# Altium PCB PCB1.PcbDoc
Units mm, origin at the board's own origin, x right, y up, seen from the top; angles counter-clockwise.
Board outline 32.5 x 30.25 mm, 2 copper layers (L1, L2), stack 1.594 mm thick; 36 components, 64 nets, 173 pads, 102 vias.
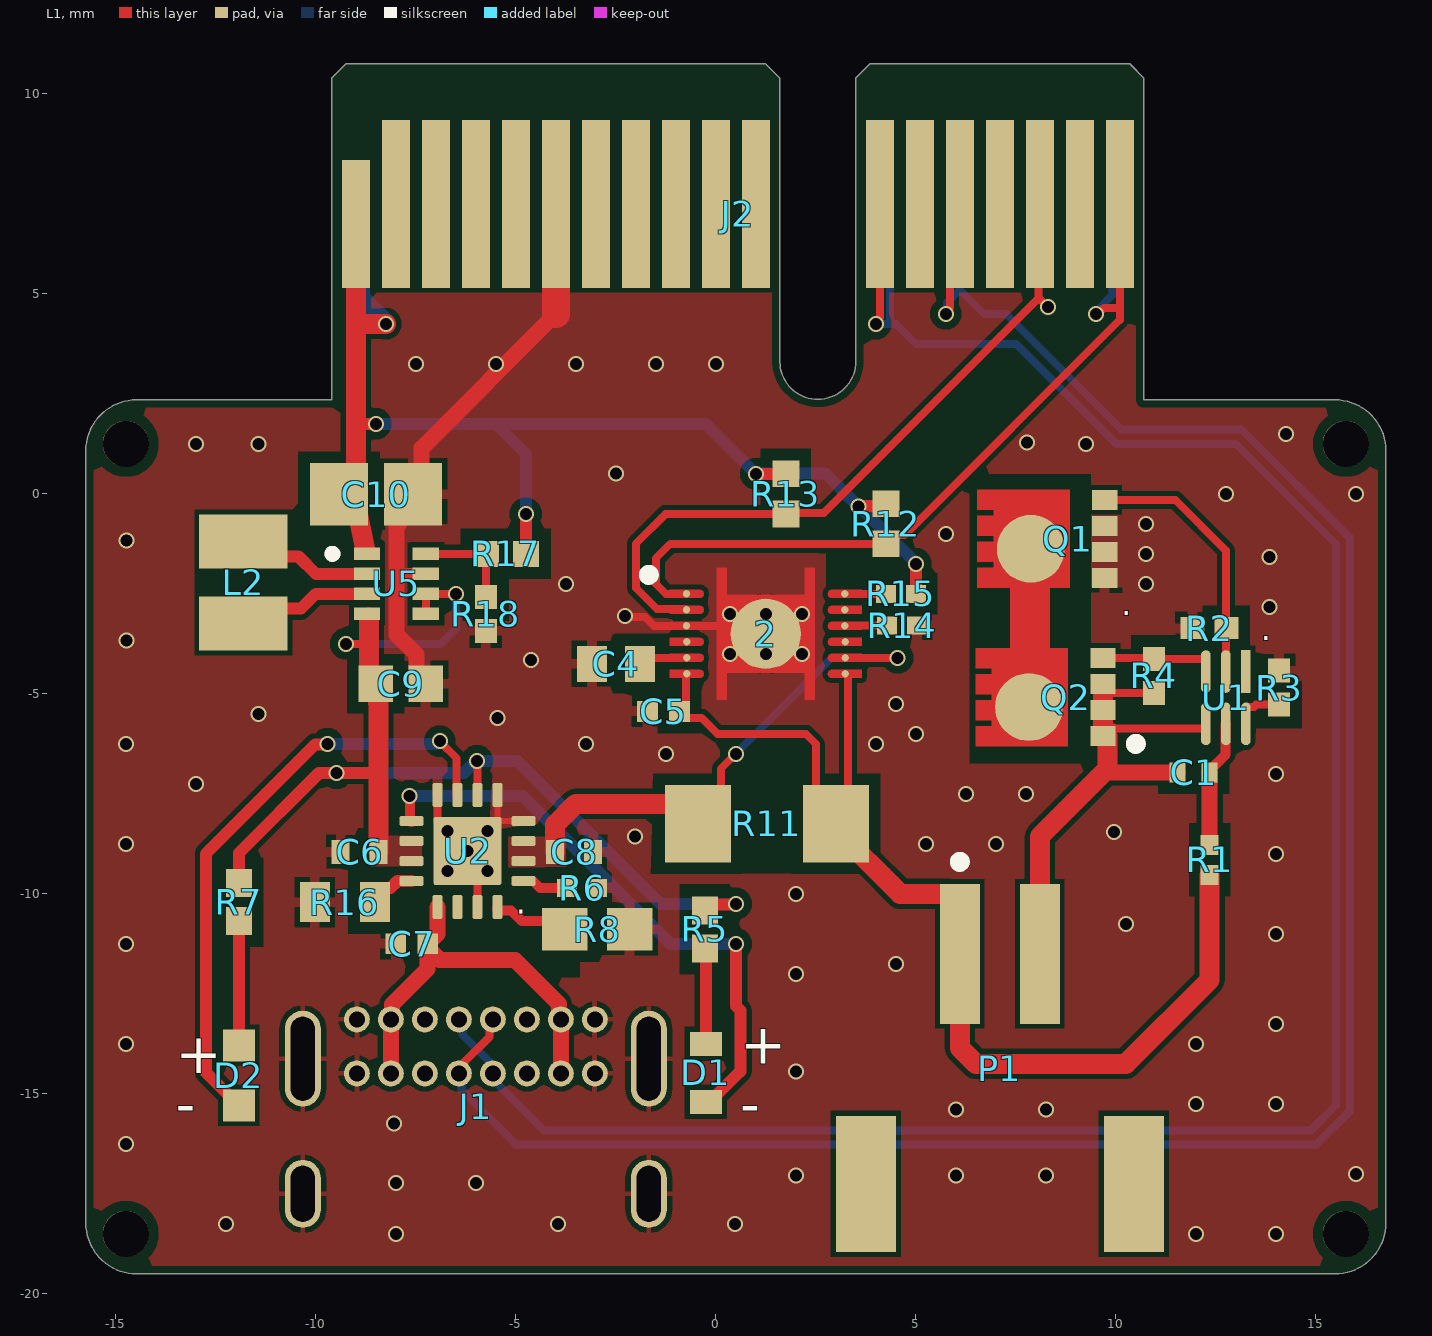
[diagram p0: L1 view]
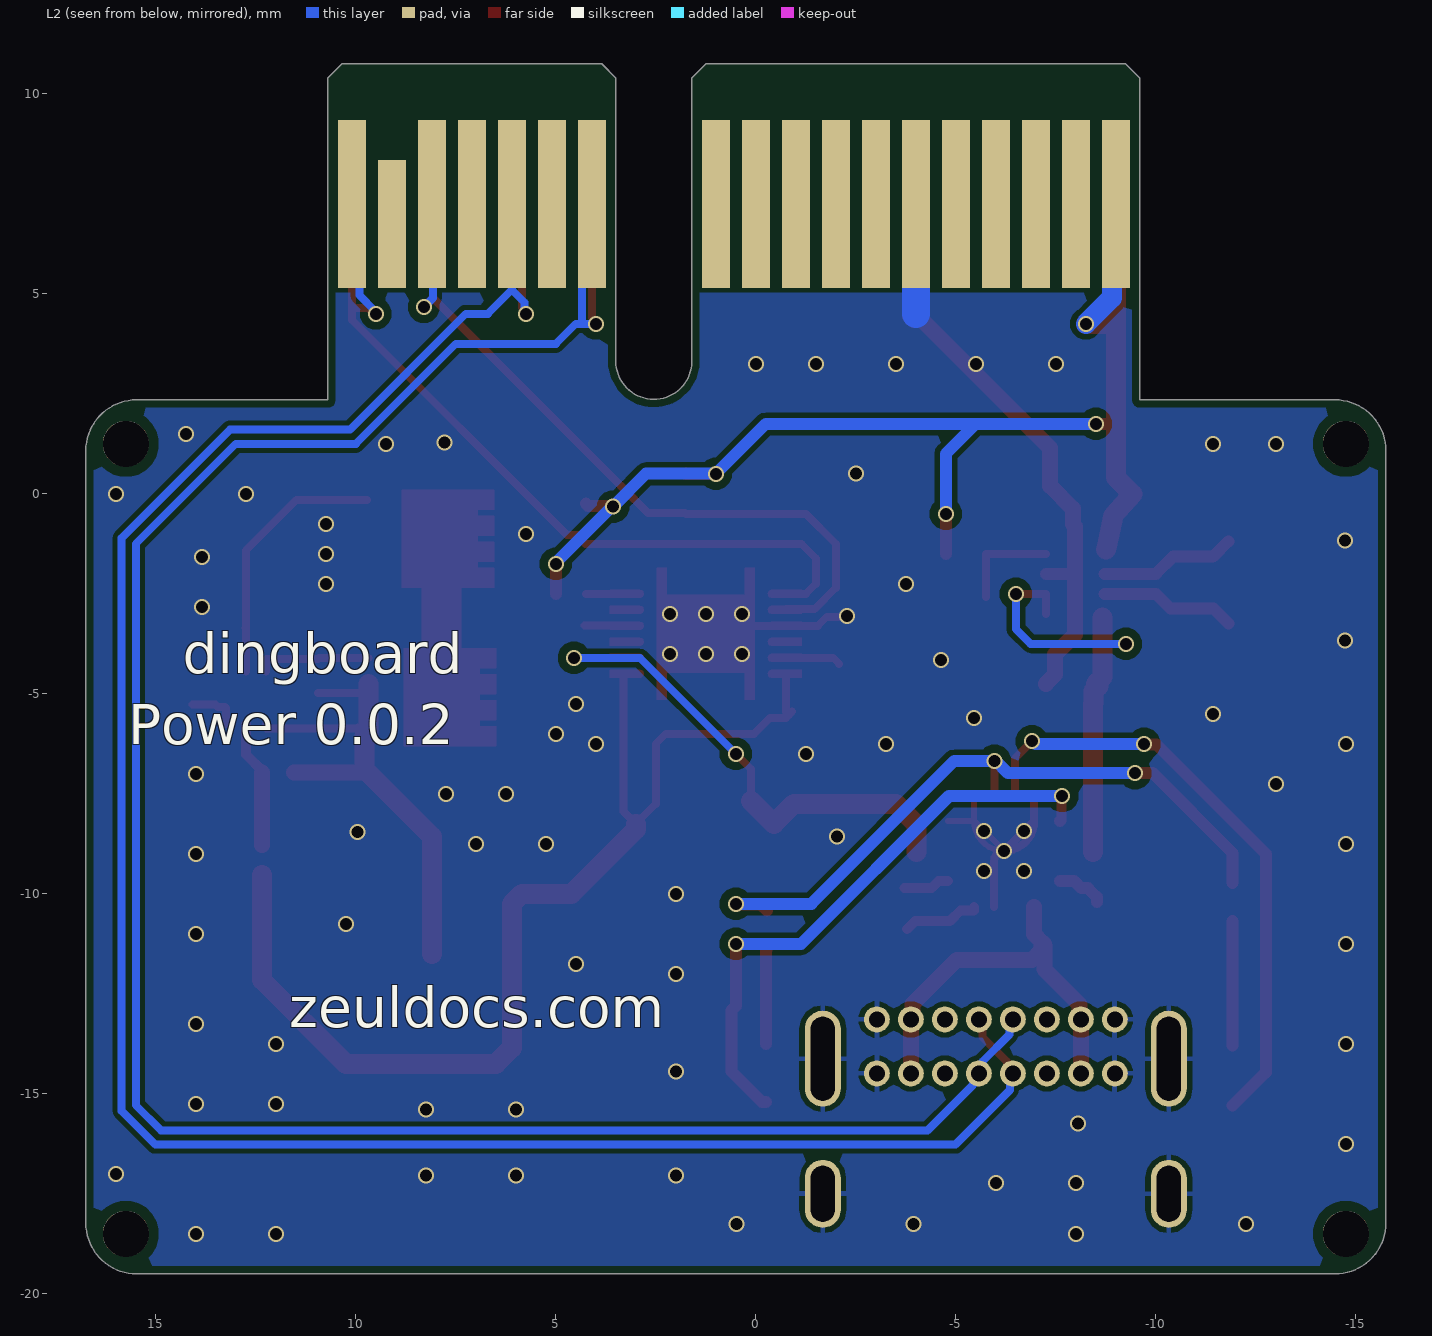
[diagram p1: L2 view, seen from below]
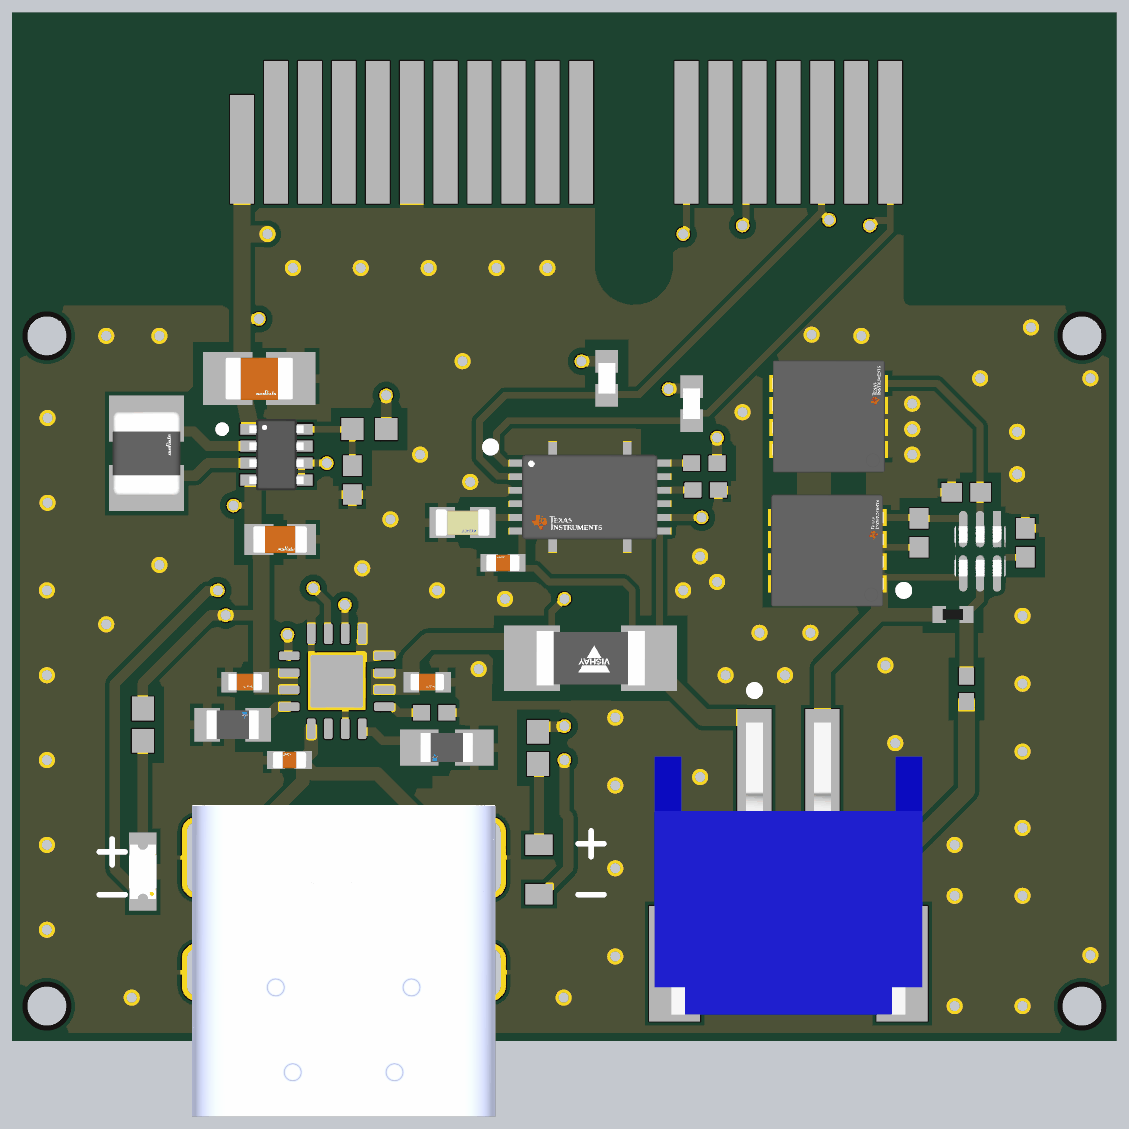
[diagram p2: 3D render of the assembled board from above, using the file's embedded part models]

## Layer stack, top to bottom
Top Solder: solder mask 0.0025, Solder Resist, Dk 1
L1: signal copper 0.035
Core: dielectric 1.524, FR-4, Dk 4.6
L2: signal copper 0.035
Bottom Solder: solder mask 0.0025, Solder Resist, Dk 1

## Board outline
-15.75,-18.23 ccw(c-14.48,-18.23) -14.48,-19.5 15.48,-19.5 ccw(c15.48,-18.23) 16.75,-18.23 16.75,1.08 ccw(c15.48,1.08) 15.48,2.35 10.7,2.35 10.7,10.396 10.346,10.75 3.854,10.75 3.5,10.396 3.5,3.3 3.5,3.313 cw(c2.55,3.313) 1.6,3.3 1.6,10.396 1.245,10.75 -9.245,10.75 -9.6,10.396 -9.6,2.35 -14.48,2.35 ccw(c-14.48,1.08) -15.75,1.08

## Design rules (kind name [scope] priority, off if disabled: settings)
BoardOutlineClearance [All] p1: gap=0.2 ignorepadtopadclearanceinfootprint=FALSE
Clearance Clearance_CAP [InComponentClass('1power')] p1: gap=0.127 ignorepadtopadclearanceinfootprint=FALSE except(0.15: Arc-SMDPad Track-SMDPad SMDPad-SMDPad SMDPad-Text THPad-Text; 0.152: Arc-Arc Arc-Track Track-Track; 0.2: Arc-Via Track-Via Via-Via Via-Hole; 0.25: Arc-Hole Track-Hole SMDPad-Hole THPad-Hole Fill-Hole Poly-Hole Region-Hole Text-Hole; 0.28: Arc-THPad Track-THPad; 0.3: SMDPad-Fill SMDPad-Poly SMDPad-Region)
Clearance [All] p2: gap=0.127 ignorepadtopadclearanceinfootprint=FALSE except(0.15: Arc-SMDPad Track-SMDPad SMDPad-SMDPad SMDPad-Text THPad-Text; 0.152: Arc-Arc Arc-Track Track-Track; 0.2: Arc-Via Track-Via Via-Via Via-Hole; 0.25: Arc-Hole Track-Hole SMDPad-Hole THPad-Hole Fill-Hole Poly-Hole Region-Hole Text-Hole; 0.28: Arc-THPad Track-THPad)
ComponentClearance [All] p1: gap=0.127 collisioncheckmode=3 verticalgap=0.127 showdistances=TRUE
DiffPairsRouting [All] p1: maxlimit=0.254 minlimit=0.1 mostfreqgap=0.127 substack1={52762232-6F04-41D9-A687-E8FF21229EE0} toplayer_{52762232-6f04-41d9-a687-e8ff21229ee0}_minwidth=0.381 toplayer_{52762232-6f04-41d9-a687-e8ff21229ee0}_maxwidth=0.381 toplayer_{52762232-6f04-41d9-a687-e8ff21229ee0}_prefwidth=0.381 bottomlayer_{52762232-6f04-41d9-a687-e8ff21229ee0}_minwidth=0.381 bottomlayer_{52762232-6f04-41d9-a687-e8ff21229ee0}_maxwidth=0.381 bottomlayer_{52762232-6f04-41d9-a687-e8ff21229ee0}_prefwidth=0.381 toplayer_minwidth=0.1 toplayer_maxwidth=25.4 toplayer_prefwidth=0.127 bottomlayer_minwidth=0.1 bottomlayer_maxwidth=25.4 bottomlayer_prefwidth=0.127 substack2={80DEA706-9527-40CE-9459-B2B8583E4FA4} toplayer_{80dea706-9527-40ce-9459-b2b8583e4fa4}_minwidth=0.381 toplayer_{80dea706-9527-40ce-9459-b2b8583e4fa4}_maxwidth=0.381 toplayer_{80dea706-9527-40ce-9459-b2b8583e4fa4}_prefwidth=0.381 bottomlayer_{80dea706-9527-40ce-9459-b2b8583e4fa4}_minwidth=0.381 bottomlayer_{80dea706-9527-40ce-9459-b2b8583e4fa4}_maxwidth=0.381 bottomlayer_{80dea706-9527-40ce-9459-b2b8583e4fa4}_prefwidth=0.381 maxuncoupledlength=12.7
Height [All] p1: minheight=0 maxheight=1816.048 prefheight=12.7
HoleSize [All] p1: absolutevalues=TRUE maxlimit=6.3 minlimit=0.15 maxpercent=80.000 minpercent=20.000
HoleToHoleClearance [All] p1: gap=0.2 allowstackedmicrovias=FALSE
MinimumAnnularRing [All] p1: minimumring=0.05
MinimumSolderMaskSliver [All] p1: minsoldermaskwidth=0
PlaneClearance [All] p1: clearance=0.127
PlaneConnect PlaneConnectPowerPads [InPadClass('PowerPads')] p1: planeconnectstyle=Direct reliefexpansion=0.508 reliefentries=4 reliefconductorwidth=0.254 reliefairgap=0.254
PlaneConnect [All] p2: pad.planeconnectstyle=Relief pad.reliefexpansion=0.3 pad.reliefentries=4 pad.reliefconductorwidth=0.127 pad.reliefairgap=0.127 via.planeconnectstyle=Direct via.reliefexpansion=0.3 via.reliefentries=4 via.reliefconductorwidth=0.127 via.reliefairgap=0.127
PolygonConnect PolygonConnectPowerPins [InPolygonClass('PolygonClass_Power_Pins')] p1: connectstyle=Direct reliefconductorwidth=0.254 reliefentries=4 polygonreliefangle="90 Angle" airgapwidth=0.254
PolygonConnect PolygonConnectPowerPads [All vs (InPadClass('PowerPads'))] p2: connectstyle=Direct reliefconductorwidth=0.254 reliefentries=4 polygonreliefangle="90 Angle" airgapwidth=0.254
PolygonConnect [All] p3: thpad.connectstyle=Relief thpad.reliefconductorwidth=0.127 thpad.reliefentries=4 thpad.polygonreliefangle="90 Angle" thpad.airgapwidth=0.127 smdpad.connectstyle=Relief smdpad.reliefconductorwidth=0.25 smdpad.reliefentries=4 smdpad.polygonreliefangle="90 Angle" smdpad.airgapwidth=0.127 via.connectstyle=Direct via.reliefconductorwidth=0.127 via.reliefentries=4 via.polygonreliefangle="90 Angle" via.airgapwidth=0.127
RoutingVias [All] p1: holewidth=0.2 width=0.35 viastyle="Through Hole" minholewidth=0.15 minwidth=0.25 maxholewidth=0.3 maxwidth=0.7
SilkToSilkClearance [All] p1: silktosilkclearance=0.15
SilkToSolderMaskClearance [IsPad] p1: minsilkscreentomaskgap=0.127 clearancetoexposedcopper=TRUE
SolderMaskExpansion [All] p1: expansion=0.038 istentingtop=FALSE
SupplyNets "Schematic Supply Nets_7" [InNet('PGND')] p1: voltage=0.000
SupplyNets "Schematic Supply Nets_6" [InNet('VBAT')] p2: voltage=0.000
SupplyNets "Schematic Supply Nets_5" [InNet('3.3V')] p3: voltage=0.000
SupplyNets "Schematic Supply Nets_4" [InNet('PACKP')] p4: voltage=0.000
SupplyNets "Schematic Supply Nets_1" [InNet('VPRE')] p5: voltage=0.000
SupplyNets "Schematic Supply Nets" [InNet('VUSB')] p6: voltage=0.000
Width [All] p1: maxlimit=25.4 minlimit=0.1 preferedwidth=0.25 substack1={52762232-6F04-41D9-A687-E8FF21229EE0} substack2={80DEA706-9527-40CE-9459-B2B8583E4FA4} minimp=50.000000 maximp=50.000000 favimp=50.000000
20 further rules are at their usual default settings.

## Classes and differential pairs
polygon class PolygonClass_Power_Pins: PGND_L01_P045 PGND_L01_P046 PGND_L01_P049 VBAT_L01_P039 VPRE_L01_P041
component class 1power: C1 C4 C5 C6 C7 C8 C9 C10 R1 R2 R3 R4 R5 R6 R7 R8 R11 R12 R13 R14 R15 R16 R17 R18

## Components (designator, comment, footprint, x,y, rotation, side; value= is the part's Value field where it differs from the comment)
2 "Fuel Guage" FP-DRZ0012A-MFG 1.25,-3.5 r270 top (schematic designator U4)
C1 "0.1uF" FP-GRM15-MFG 11.948,-6.962 r0 top value=0.10μF
C4 "0.47uF" FP-C0603C-CF-MFG -2.5,-4.25 r180 top value="0.47 μF"
C5 "1uF" FP-C0402C105K8PACTU-MFG -1.31,-5.44 r180 top
C6 "4.7uF" FP-ZRB15X-0_15-MFG -8.908,-8.952 r0 top
C7 "1uF" FP-C0402C105K8PACTU-MFG -7.6,-11.25 r180 top
C8 "4.7uF" FP-ZRB15X-0_15-MFG -3.541,-8.952 r0 top
C9 "22uF" FP-GRM187-0_2-IPC_C -7.875,-4.75 r0 top
C10 "47uF" FP-GRM219-0_2-0_1-IPC_A -8.493,-0.01 r0 top
D1 "Red LED" VISH-TLMS1000_V -0.25,-14.475 r270 top
D2 "White LED" FP-6_541-5091_01-4-MFG -11.923,-14.54 r90 top
J1 "USB-C" GCT_USB4085-GF-A_REVB -6,-17.5 r0 top
J2 "PCIE" SAMTEC_PCIE-036-02-X-D-EMS3 0.55,7 r180 top
L2 "1uH" FP-DFE252012C-IPC_B -11.811,-2.214 r90 top
P1 "JST" "JST- S2B-PH-SM4-TB(LF)(SN)-2_V" 7.1,-14.95 r0 top
Q1 "Protection IC FET" FP-DQG0008A-MFG 8.29,-1.125 r90 top
Q2 "Protection IC FET" FP-DQG0008A-MFG 8.244,-5.081 r90 top
R1 "3.3K" RESC1005X40X25LL05T10 12.348,-9.152 r90 top
R2 "1M" RESC1005X40X25NL05T10 12.339,-3.356 r0 top
R3 "2.2K" RESC1005X40X25NL05T10 14.085,-4.847 r270 top
R4 "1M" RESC1005X40X25NL05T10 10.949,-4.554 r270 top
R5 "1.5K" RESC1005X40X25ML05T10 -0.275,-10.889 r90 top
R6 "10K" RESC1005X40X25LL05T10 -3.341,-9.852 r180 top
R7 "1.5K" RESC1005X40X25ML05T10 -11.923,-10.209 r90 top
R8 "1.8K" FP-CRCW0603-e3-IPC_A -2.966,-10.883 r180 top
R11 "0.01Ohm 1W 1206 1%" FP-WSLP1206-FP_1_65x1_93x-MFG 1.275,-8.25 r180 top
R12 "5.1K" FP-CRCW0402-e3-IPC_A 4.25,-0.748 r270 top
R13 "5.1K" FP-CRCW0402-e3-IPC_A 1.75,0 r270 top
R14 "10K" RESC1005X40X25LL05T10 4.659,-3.294 r0 top
R15 "10K" RESC1005X40X25LL05T10 4.625,-2.5 r0 top
R16 "3k" FP-CRCW0603-e3-MFG -9.276,-10.209 r0 top
R17 "511K" RESC1005X40X25ML05T05 -5.25,-1.5 r0 top
R18 "91k" RESC1005X40X25NL05T10 -5.75,-3 r90 top
U1 "Protection Ic" FP-DSE0006A-IPC_A 12.75,-5.096 r270 top
U2 "Charger/Switch" RGT0016C_V -6.208,-8.928 r180 top
U5 "Buck-Boost" SOT50P160X60-8N -7.985,-2.25 r0 top

## Footprints (in the part's own frame and the unit in brackets; to place one, negate y for a bottom-side part, rotate by r counter-clockwise, add the part's x,y. Pads: shape width x height; smd on the part's side, far side on the other; paste and mask are expansions set on the pad)
FP-6_541-5091_01-4-MFG [mm] "SMD, 2-Leads, Body 0.8x1.6mm"
  rect 0.8x0.8 smd paste+0 mask+0: 1(-0.75,0) 2(0.75,0)
  body extent -1.25,-0.6 1.25,0.6, height 0.25
FP-C0402C105K8PACTU-MFG [mm]
  rect 0.52x0.52 smd paste+0 mask+0: 1(-0.4,0) 2(0.4,0)
  body extent -0.8,-0.4 0.8,0.4, height 0.25
FP-C0603C-CF-MFG [mm]
  rect 0.75x0.9 smd paste+0 mask+0: 1(-0.6,0) 2(0.6,0)
  body extent -1.2,-0.6 1.2,0.6, height 0.25
FP-CRCW0402-e3-IPC_A [mm]
  rect 0.668x0.672 smd paste+0 mask+0: 1(-0.502,0) 2(0.502,0)
  body extent -1.04,-0.54 1.04,0.54, height 0.25
FP-CRCW0603-e3-IPC_A [mm]
  rect 1.135x1.062 smd paste+0 mask+0: 1(-0.815,0) 2(0.815,0)
  body extent -1.88,-1.03 1.88,1.03, height 0.25
FP-CRCW0603-e3-MFG [mm]
  rect 0.75x1 smd paste+0 mask+0: 1(-0.75,0) 2(0.75,0)
  body extent -1.22,-0.6 1.22,0.6, height 0.25
FP-DFE252012C-IPC_B [mm]
  rect 1.355x2.206 smd paste+0 mask+0: 1(-1.026,0) 2(1.026,0)
  body extent -1.95,-1.35 1.95,1.35, height 0.25
FP-DQG0008A-MFG [mm]
  rect 0.5x0.63 smd paste-1000 mask+0: 1(-0.975,-1.435) 2(-0.325,-1.435) 3(0.325,-1.435) 4(0.975,-1.435)
  round 1.696 smd paste-1000 mask+0: 5-6-7-8(-0.25,0.415)
  L1 region: -1.225,-0.56 1.225,-0.56 1.225,1.75 0.725,1.75 0.725,1.34 0.575,1.34 0.575,1.75 0.075,1.75 0.075,1.34 -0.075,1.34 -0.075,1.75 -0.575,1.75 -0.575,1.34 -0.725,1.34 -0.725,1.75 -1.225,1.75 -1.225,-0.56
  body extent -1.8,-1.85 1.8,1.85, height 0.25
FP-DRZ0012A-MFG [mm]
  round 0.18 smd paste-1000 mask+0: 1(-1,-1.985) 2(-0.6,-1.985) 3(-0.2,-1.985) 4(0.2,-1.975) 5(0.6,-1.975) 6(1,-1.975) 7(1,1.985) 8(0.6,1.985) 9(0.2,1.985) 10(-0.2,1.975) 11(-0.6,1.975) 12(-1,1.975)
  round 1.755 smd paste-1000 mask+0: 13(0,0)
  L1 region: -1.1,-2.4 -1.1,-1.65 -1.092,-1.612 -1.071,-1.579 -1.038,-1.558 -1,-1.55 -1,-1.55 -0.962,-1.558 -0.929,-1.579 -0.908,-1.612 -0.9,-1.65 -0.9,-1.65 -0.9,-2.4
  L1 region: -0.7,-2.4 -0.7,-1.65 -0.692,-1.612 -0.671,-1.579 -0.638,-1.558 -0.6,-1.55 -0.6,-1.55 -0.562,-1.558 -0.529,-1.579 -0.508,-1.612 -0.5,-1.65 -0.5,-1.65 -0.5,-2.4
  L1 region: -0.3,-2.4 -0.3,-1.65 -0.292,-1.612 -0.271,-1.579 -0.238,-1.558 -0.2,-1.55 -0.2,-1.55 -0.162,-1.558 -0.129,-1.579 -0.108,-1.612 -0.1,-1.65 -0.1,-1.65 -0.1,-2.4
  L1 region: 0.1,-2.4 0.1,-1.65 0.108,-1.612 0.129,-1.579 0.162,-1.558 0.2,-1.55 0.2,-1.55 0.238,-1.558 0.271,-1.579 0.292,-1.612 0.3,-1.65 0.3,-1.65 0.3,-2.4
  L1 region: 0.5,-2.4 0.5,-1.65 0.508,-1.612 0.529,-1.579 0.562,-1.558 0.6,-1.55 0.6,-1.55 0.638,-1.558 0.671,-1.579 0.692,-1.612 0.7,-1.65 0.7,-1.65 0.7,-2.4
  L1 region: 0.9,-2.4 0.9,-1.65 0.908,-1.612 0.929,-1.579 0.962,-1.558 1,-1.55 1,-1.55 1.038,-1.558 1.071,-1.579 1.092,-1.612 1.1,-1.65 1.1,-1.65 1.1,-2.4
  L1 region: 1.1,2.4 1.1,1.65 1.087,1.6 1.05,1.563 1,1.55 1,1.55 0.962,1.558 0.929,1.579 0.908,1.612 0.9,1.65 0.9,1.65 0.9,2.4
  L1 region: 0.7,2.4 0.7,1.65 0.692,1.612 0.671,1.579 0.638,1.558 0.6,1.55 0.6,1.55 0.562,1.558 0.529,1.579 0.508,1.612 0.5,1.65 0.5,1.65 0.5,2.4
  L1 region: 0.3,2.4 0.3,1.65 0.292,1.612 0.271,1.579 0.238,1.558 0.2,1.55 0.2,1.55 0.162,1.558 0.129,1.579 0.108,1.612 0.1,1.65 0.1,1.65 0.1,2.4
  L1 region: -0.1,2.4 -0.1,1.65 -0.108,1.612 -0.129,1.579 -0.162,1.558 -0.2,1.55 -0.2,1.55 -0.238,1.558 -0.271,1.579 -0.292,1.612 -0.3,1.65 -0.3,1.65 -0.3,2.4
  L1 region: -0.5,2.4 -0.5,1.65 -0.508,1.612 -0.529,1.579 -0.562,1.558 -0.6,1.55 -0.6,1.55 -0.638,1.558 -0.671,1.579 -0.692,1.612 -0.7,1.65 -0.7,1.65 -0.7,2.4
  L1 region: -0.9,2.4 -0.9,1.65 -0.908,1.612 -0.929,1.579 -0.962,1.558 -1,1.55 -1,1.55 -1.038,1.558 -1.071,1.579 -1.092,1.612 -1.1,1.65 -1.1,1.65 -1.1,2.4
  L1 region: -1.65,1.225 1.65,1.225 1.65,0.975 0.975,0.975 0.975,-0.975 1.65,-0.975 1.65,-1.225 -1.65,-1.225 -1.65,-0.975 -0.975,-0.975 -0.975,0.975 -1.65,0.975 -1.65,1.225
  silkscreen extent -1.6,-3.05 -1.35,-2.8, body extent -1.75,-2.5 1.75,2.5, height 0.25
FP-DSE0006A-IPC_A [mm]
  rect 1.065x0.242 smd paste+0 mask+0: 1(-0.654,0.5)
  rrect100% 1.065x0.242 smd paste+0 mask+0: 2(-0.654,0) 3(-0.654,-0.5) 4(0.654,-0.5) 5(0.654,0) 6(0.654,0.5)
  body extent -1.69,-1.25 1.69,1.25, height 0.25
FP-GRM15-MFG [mm]
  rect 0.4x0.5 smd paste+0 mask+0: 1(-0.4,0) 2(0.4,0)
  body extent -0.7,-0.38 0.7,0.38, height 0.25
FP-GRM187-0_2-IPC_C [mm]
  rect 0.855x0.906 smd paste+0 mask+0: 1(-0.625,0) 2(0.625,0)
  body extent -1.15,-0.6 1.15,0.6, height 0.25
FP-GRM219-0_2-0_1-IPC_A [mm]
  rect 1.455x1.556 smd paste+0 mask+0: 1(-0.926,0) 2(0.926,0)
  body extent -2.15,-1.28 2.15,1.28, height 0.25
FP-WSLP1206-FP_1_65x1_93x-MFG [mm]
  rect 1.65x1.93 smd paste+0 mask+0: 1(-1.725,0) 2(1.725,0)
  body extent -2.65,-1.06 2.65,1.06, height 0.25
FP-ZRB15X-0_15-MFG [mm]
  rect 0.45x0.6 smd paste+0 mask+0: 1(-0.475,0) 2(0.475,0)
  body extent -0.8,-0.43 0.8,0.43, height 0.25
GCT_USB4085-GF-A_REVB [mm]
  round 0.65 hole 0.4: A1(-2.975,4.36) A4(-2.125,4.36) A5(-1.275,4.36) A6(-0.425,4.36) A7(0.425,4.36) A8(1.275,4.36) A9(2.125,4.36) A12(2.975,4.36) B1(2.975,3.01) B4(2.125,3.01) B5(1.275,3.01) B6(0.425,3.01) B7(-0.425,3.01) B8(-1.275,3.01) B9(-2.125,3.01) B12(-2.975,3.01)
  oval 0.9x1.7 hole 0.6 slot 1.4 at 90 deg: S1(-4.325,0) S2(4.325,0)
  oval 0.9x2.4 hole 0.6 slot 2.1 at 90 deg: S3(-4.325,3.38) S4(4.325,3.38)
  body extent -4.47,-4.25 4.47,4.92, height 3.46
"JST- S2B-PH-SM4-TB(LF)(SN)-2_V" [mm] "SMD, 2-Leads, Body 7.9x7.6mm, Pitch 2mm"
  rect 1x3.5 smd: 1(-1,3.45) 2(1,3.45)
  rect 1.5x3.4 smd: MP1(-3.35,-2.3) MP2(3.35,-2.3)
  silkscreen extent -1.12,5.63 -0.87,5.87, body extent -3.95,-3.8 3.95,4.8, height 5.6
RESC1005X40X25LL05T10 [mm] "Chip Resistor, 2-Leads, Body 1.00x0.50mm, IPC High Density"
  rect 0.5x0.45 smd: 1(-0.375,0) 2(0.375,0)
  body extent -0.53,-0.27 0.53,0.28, height 0.4
RESC1005X40X25ML05T05 [mm] "Chip Resistor, 2-Leads, Body 1.00x0.50mm, IPC Low Density"
  rect 0.65x0.65 smd: 1(-0.5,0) 2(0.5,0)
  body extent -0.53,-0.27 0.53,0.28, height 0.4
RESC1005X40X25ML05T10 [mm] "Chip Resistor, 2-Leads, Body 1.00x0.50mm, IPC Low Density"
  rect 0.7x0.65 smd: 1(-0.475,0) 2(0.475,0)
  body extent -0.53,-0.27 0.53,0.28, height 0.4
RESC1005X40X25NL05T10 [mm] "Chip Resistor, 2-Leads, Body 1.00x0.50mm, IPC Medium Density"
  rect 0.6x0.55 smd: 1(-0.425,0) 2(0.425,0)
  body extent -0.53,-0.27 0.53,0.28, height 0.4
RGT0016C_V [mm] "QFN, 16-Leads, Body 3x3mm, Pitch 0.5mm, Thermal Pad 1.65x1.65mm"
  rrect40% 0.6x0.25 smd: 1(-1.4,0.75) 2(-1.4,0.25) 3(-1.4,-0.25) 4(-1.4,-0.75) 9(1.4,-0.75) 10(1.4,-0.25) 11(1.4,0.25) 12(1.4,0.75)
  rrect40% 0.25x0.6 smd: 5(-0.75,-1.4) 6(-0.25,-1.4) 7(0.25,-1.4) 8(0.75,-1.4) 13(0.75,1.4) 14(0.25,1.4) 15(-0.25,1.4) 16(-0.75,1.4)
  rrect6% 1.55x1.55 on Top Paste: 17(0,0)
  rrect6% 1.7x1.7 smd paste-0.85: 17(0,0)
  body extent -1.5,-1.5 1.5,1.5, height 1
SAMTEC_PCIE-036-02-X-D-EMS3 [mm]
  rect 0.7x3.2 smd: A01(9.55,0.25)
  rect 0.7x4.2 smd: A02(8.55,-0.25) A03(7.55,-0.25) A04(6.55,-0.25) A05(5.55,-0.25) A06(4.55,-0.25) A07(3.55,-0.25) A08(2.55,-0.25) A09(1.55,-0.25) A10(0.55,-0.25) A11(-0.45,-0.25) A12(-3.55,-0.25) A13(-4.55,-0.25) A14(-5.55,-0.25) A15(-6.55,-0.25) A16(-7.55,-0.25) A17(-8.55,-0.25) A18(-9.55,-0.25)
  rect 0.7x4.2 smd far side: B01(9.55,-0.25) B02(8.55,-0.25) B03(7.55,-0.25) B04(6.55,-0.25) B05(5.55,-0.25) B06(4.55,-0.25) B07(3.55,-0.25) B08(2.55,-0.25) B09(1.55,-0.25) B10(0.55,-0.25) B11(-0.45,-0.25) B12(-3.55,-0.25) B13(-4.55,-0.25) B14(-5.55,-0.25) B15(-6.55,-0.25) B16(-7.55,-0.25) B18(-9.55,-0.25)
  rect 0.7x3.2 smd far side: B17(-8.55,0.25)
SOT50P160X60-8N [mm]
  rect 0.66x0.32 smd mask+0.05: 1(-0.735,0.75) 2(-0.735,0.25) 3(-0.735,-0.25) 4(-0.735,-0.75) 5(0.735,-0.75) 6(0.735,-0.25) 7(0.735,0.25) 8(0.735,0.75)
  silkscreen extent -1.7,0.65 -1.5,0.85, body extent -0.8,-1.05 0.8,1.05, height 0.6
VISH-TLMS1000_V [mm] "SMD, 2-Leads, Body 0.8x1.6mm"
  rect 0.6x0.8 smd: 1(-0.725,0) 2(0.725,0)
  body extent -0.8,-0.4 0.8,0.4, height 0.65

## Part data
2: library part CMP-04911-000005-1, "IC BATT FUEL GAUGE LICOO2 12SON", Ambient Temperature Range High=+85°C, Ambient Temperature Range Low=-40°C, Manufacturer="Texas Instruments", Manufacturer Part Number=BQ27441DRZT-G1A, Max Supply Voltage=4.5V, Min Supply Voltage=2.45V, Nominal Supply Current=93uA, Output Voltage=1.8V, Package=DRZ0012A, Temperature="-40°C to +85°C", Automotive=No, Category=IC, ComponentLink2Description=Datasheet, ComponentLink2URL=http://www.ti.com/lit/ds/symlink/bq27441-g1.pdf, Device Class L1="Integrated Circuits (ICs)", Device Class L2="Power Management ICs", Device Class L3="Battery Management", Digikey Description="IC BATT FUEL GAUGE LICOO2 12SON", Height=1mm, Lead Free=Yes, Mouser Description="Battery Management System-Side Impdance Trck Bttry Fuel Gge", Number Of Cells=1, Number Of Outputs=1, Octopart=https://octopart.com/bq27441drzt-g1a-texas+instruments-30555831, RoHS=TRUE, Standoff Height=0mm, Temperature Range High=+85°C, Temperature Range Low=-40°C
C1: library part CMP-2100-03641-2, "CAP CER 0.1UF 16V X7R 0402", Capacitance=0.10μF, Manufacturer=Murata, Manufacturer Part Number=GRM155R71C104KA88D, Package=GRM15, Temperature="-55°C to +125°C", Temperature Characteristic=X7R, Temperature Range High=+125°C, Temperature Range Low=-55°C, Tolerance=10%, Voltage Rating=16Vdc, Category=Cap, ComponentLink2Description=Datasheet, ComponentLink2URL=https://search.murata.co.jp/Ceramy/image/img/A01X/G101/ENG/GRM155R71H471KA01-01A.pdf, Device Class L1="Passive Components", Device Class L2=Capacitors, Device Class L3="Ceramic Capacitors", Digikey Description="CAP CER 0.1UF 16V X7R 0402", Height=0.55mm, Ipc Land Pattern Name=CAPC10050X219, Lead Free=yes, Material=Ceramic, Mouser Description="0402 0.1 uF 16V ±10 % Tolerance X7R SMT Multilayer Ceramic Capacitor", Octopart=https://octopart.com/grm155r71c104ka88d-murata-196880, RoHS=TRUE, Standoff Height=0mm
C4: library part CMP-2006-03235-2, "CAP CER 0.47UF 16V X7R 0603", Capacitance="0.47 μF", Manufacturer=KEMET, Manufacturer Part Number=C0603C474K4RACTU, Package=C0603C-CF, Temperature="-55°C to +125°C", Temperature Characteristic=X7R, Temperature Coefficient=30ppm/°C, Temperature Range High=+125°C, Temperature Range Low=-55°C, Tolerance=0.1, Voltage Rating="16 V", Automotive=Yes, Automotive Grade="Grade 1", Category=Cap, ComponentLink2Description=Datasheet, ComponentLink2URL=https://api.kemet.com/component-edge/download/datasheet/C0603C100J5GACAUTO.pdf, Device Class L1="Passive Components", Device Class L2=Capacitors, Device Class L3="Ceramic Capacitors", Digikey Description="CAP CER 0.47UF 16V X7R 0603", Height=0.87mm, Lead Free=Yes, Material=Ceramic, Mouser Description="0603 C 470nF Ceramic Multilayer Capacitor, 16 V, +125degC, X7R Dielec, +/-10%", Octopart=https://octopart.com/c0603c474k4ractu-kemet-109683, RoHS=TRUE
C5 C7: library part CMP-2008-02081-2, "CAP CER 1UF 10V X5R 0402", Case Code (Imperial)=0402, Case Code (Metric)=1005, Dielectric=X5R, Dielectric Material=Ceramic, Max Operating Temperature=85°C, Min Operating Temperature=-55°C, Package Quantity=1, Tolerance=10%, Voltage=10V, Capacitance=1uF, Case/Package=0402, Construction=Flat, Contact Plating=Tin, Depth=0.5mm, Dissipation Factor=5%, Height=0.5mm, Lead Free="Lead Free", Length=1mm, Mount="Surface Mount", Number of Pins=2, Packaging="Tape and Reel", Radiation Hardening=No, REACH SVHC="No SVHC", RoHS Compliant=Yes, Series=C, Termination=SMD/SMT, Thickness=0.022inch, Voltage Rating=10V, Voltage Rating (DC)=10V, Width=0.5mm
C6 C8: library part CMP-06035-062377-1, "CAP CER 4.7UF 10V X5R 0402", Case Code (Imperial)=0402, Case Code (Metric)=1005, Dielectric=X5R, Max Operating Temperature=85°C, Min Operating Temperature=-55°C, Tolerance=20%, Voltage=10V, Capacitance=4.7uF, Case/Package=0402, Depth=0.5mm, Height=0.65mm, Length=0.039inch, Mount="Surface Mount", Packaging="Cut Tape", REACH SVHC="No SVHC", RoHS Compliant=Yes, Thickness=0.031inch, Voltage Rating=10V, Voltage Rating (DC)=10V, Width=0.02inch
C9: library part CMP-06035-049226-1, "Chip Multilayer Ceramic Capacitors for General Purpose, 0603, 22uF, X5R, 15%, 20%, 10V", Case Code (Imperial)=0603, Case Code (Metric)=1608, Dielectric=X5R, Max Operating Temperature=85°C, Min Operating Temperature=-55°C, Tolerance=20%, Voltage Rating=10V, Capacitance=22uF, Case/Package=0603, Length=0.063inch, Mount="Surface Mount", Packaging="Tape and Reel", Thickness=0.031inch, Voltage Rating (DC)=10V, Width=0.031inch
C10: library part CMP-06035-004086-1, "Chip Multilayer Ceramic Capacitors for General Purpose, 0805, 47uF, X5R, 15%, 20%, 6.3V", Case Code (Imperial)=0805, Case Code (Metric)=2012, Max Operating Temperature=85°C, Min Operating Temperature=-55°C, Tolerance=20%, Voltage Rating=6.3V, Capacitance=47uF, Case/Package=0805, Length=0.079inch, Mount="Surface Mount", Packaging="Tape and Reel", Thickness=0.037inch, Width=0.049inch
D1: library part CMP-2000-07254-1, "Low Current LED, 40 mW, 1.8 V, -40 to 100 degC, 2-Pin SMD (0603), RoHS, Tape and Reel", Forward Current If=2mA, Forward Voltage=1.8V, LED Colour=Red, Manufacturer=Vishay, Package Description="2-Pin Surface Mount Device, Body 1.6 x 0.8 mm", Package Reference=TLMS1000, Automotive Qualification Standard=AEC-Q100, Bulb Size=1.6mmx0.8mm, Datasheet URL=https://datasheet.ciiva.com/5798/1698881-5798337.pdf, Datasheet Version="Rev. 1.7, 02/2011", LED Mounting=SMD, Lens Shape=Rectangular, Luminous Intensity=4mcd, Manufacturer URL=http://www.vishay.com/, Mounting Technology=SurfaceMount, MSL=MSL2-1year, Packaging=CutTape, Product Range=-, SVHC=ToBeAdvised, Viewing Angle=80°, Wavelength Typ=636nm
D2: library part CMP-02520-000007-1, "LED COOL WHITE 0603 SMD", Ambient Temperature Range High=+80°C, Ambient Temperature Range Low=-20°C, Colour=White, Forward Current=5mA, Forward Voltage=3.15V, Manufacturer=Vishay, Manufacturer Part Number=VLMW1300-GS08, Package=6.541-5091.01-4, Power Dissipation=70mW, Temperature="-20°C to +80°C", Automotive=No, Category=Diode, ComponentLink2Description=Datasheet, ComponentLink2URL=http://www.vishay.com/docs/82435/vlmw1300.pdf, Device Class L1=Optoelectronics, Device Class L2=LEDs, Device Class L3=unset, Digikey Description="LED COOL WHITE 0603 SMD", Height=0.75mm, Lead Free=Yes, Led Orientation="Top View", Luminous Intensity=180mcd, Mouser Description="LED; SMD; 0603; white cold; 45-180mcd; 7000(typ)K; 130°; 5mA", Octopart=https://octopart.com/vlmw1300-gs08-vishay-21709203, RoHS=TRUE, Temperature Range High=+80°C, Temperature Range Low=-20°C, Viewing Angle=130°
J1: library part USB4085-GF-A_REVB, "USB-C (USB TYPE-C) USB 2.0 æ’åº§è¿žæŽ¥å™¨ 24 (16+8 Dummy) ä½é€šå­”ã€ç›´è§’ã€ä½Žæˆæœ¬ã€3.46mm å¤–å½¢ã€16 é’ˆã€æ°´å¹³ã€é¡¶éƒ¨å®‰è£…", Package=None, Check_prices=https://www.snapeda.com/parts/USB4085-GF-A/Global+Connector+Technology/view-part/?ref=eda, MF="Global Connector Technology", MP=USB4085-GF-A, SnapEDA_Link=https://www.snapeda.com/parts/USB4085-GF-A/Global+Connector+Technology/view-part/?ref=snap
J2: library part PCIE-036-02-X-D-EMS3, "PCI EXPRESS EDGE MOUNT ASSEMBLY,36PINS.", Package=None, Availability=Unavailable, MP=PCIE-036-02-X-D-EMS3, Price=None
L2: library part CMP-06042-006150-1, "Shielded Wirewound Inductor 1uH 20% 3200mA 0.042Ω 1008 (2520), DFE252012P-1R0M=P2", Case Code (Imperial)=1008, Case Code (Metric)=2520, Current Rating=4.3A, DC Resistance (DCR)=42mR, Max DC Current=3.2A, Max Operating Temperature=125°C, Min Operating Temperature=-40°C, Resistor Type=Wirewound, Test Frequency=1MHz, Tolerance=20%, Case/Package=1008, Core Material=Ferrite, Depth=2mm, Height - Seated (Max)=0.039inch, Inductance=1uH, Length=0.098inch, Mount="Surface Mount", Packaging="Tape and Reel", Shielding=Shielded, Width=0.079inch
P1: library part CMP-1755-00001-1, "Male Header, Pitch 2 mm, 1 x 2 Position, Height 5.5 mm, -25 to 85 degC, RoHS, Tape and Reel", Colour=Black, Current Rating="3 A", Max Operating Temperature=105degC, Min Operating Temperature=-65degC, Package Quantity=100, ComponentLink1Description="Manufacturer URL", ComponentLink1URL=http://www.jst.com/home2.html, ComponentLink2Description=Datasheet, ComponentLink2URL=http://www.jst-mfg.com/product/pdf/eng/ePH.pdf, Contact Finish=Lead, Contact Material=Bronze, Contact Plating=Tin, DatasheetVersion=Dec-12, Height="8.13 mm", Lead Pitch="0.1 inch", Length="101.19 mm", Mount="Through Hole", PackageDescription="Male Header, Pitch 2 mm, 1 x 2 Position, Height 5.5 mm", PackageReference=S2B-PH-SM4-TB(LF)(SN)-2, Packaging=Bulk, Pins=40, Radiation Hardening=No, RoHSCompliant=True, Width="2.34 mm"
Q1 Q2: library part CMP-04962-000044-1, "Protection IC FET, MOSFET N-CH 25V 60A 8-SON, CSD16406Q3", Case/Package=SON, Continuous Drain Current (ID)=60A, Drain to Source Breakdown Voltage=25V, Gate to Source Voltage (Vgs)=16V, Input Capacitance=1.1nF, Max Operating Temperature=150°C, Max Power Dissipation=2.7W, Min Operating Temperature=-55°C, Package Quantity=1, Supplier Part Number 1=595-CSD16406Q3, Threshold Voltage=1.7V, Contact Plating=Tin, Drain to Source Voltage (Vdss)=25V, Dual Supply Voltage=25V, Element Configuration=Single, Fall Time=4.8ns, Lead Free="Contains Lead", Mount="Surface Mount", Nominal Vgs=1.7V, Number of Elements=1, Number of Pins=8, Packaging="Tape and Reel", Polarity=N-CHANNEL, Power Dissipation=2.7W, Radiation Hardening=No, Rds On Max=5.3mR, REACH SVHC="No SVHC", Rise Time=12.9ns, RoHS Compliant=Yes, Series=NexFET™, Supplier 1=Mouser, Termination=SMD/SMT, Turn-Off Delay Time=8.5ns, Turn-On Delay Time=7.3ns
R1: library part CMP-2002-07652-1, Manufacturer="Yageo / Phycomp", Part Number=RC0402FR-073K3L
R2 R4: library part CMP-2002-07490-1, Manufacturer="Yageo / Phycomp", Part Number=RC0402FR-071ML
R3: library part CMP-2002-07567-1, Manufacturer="Yageo / Phycomp", Part Number=RC0402FR-072K2L
R5 R7: library part CMP-2002-07464-1, Manufacturer="Yageo / Phycomp", Part Number=RC0402FR-071K5L
R6 R14 R15: library part CMP-2002-07353-1, Manufacturer="Yageo / Phycomp", Part Number=RC0402FR-0710KL
R8: library part CMP-02407-005782-1, "RES Thick Film, 1.8kΩ, 1%, 0.1W, 100ppm/°C, 0603", Case Code (Imperial)=0603, Case Code (Metric)=1608, Max Operating Temperature=155°C, Max Power Dissipation=100mW, Min Operating Temperature=-55°C, Package Quantity=5000, Resistance=1.8kR, Temperature Coefficient=100ppm/°C, Tolerance=1%, Voltage Rating=75V, Case/Package=0603, Composition="Thick Film", Contact Plating=Tin, Depth=0.85mm, Features="Automotive AEC-Q200", Height=0.45mm, Lead Free="Lead Free", Length=1.55mm, Military Standard=Not, Number of Terminations=2, Packaging="Tape and Reel", Power Rating=100mW, Radiation Hardening=No, Termination=SMD/SMT, Voltage Rating (DC)=75V, Weight=7.1E-05oz, Width=0.033inch
R11: library part CMP-2003-04373-2, "RES 0.01 OHM 1% 1W 1206", Case Code (Imperial)=1206, Case Code (Metric)=3216, Max Operating Temperature=170°C, Max Power Dissipation=1W, Min Operating Temperature=-65°C, Package Quantity=1, Resistance=10mR, Resistance Tolerance=1%, Resistor Type="Metal Strip", Temperature Coefficient=75ppm/°C, Case/Package=1206, Construction=Rectangular, Contact Plating=Tin, Depth=1.6mm, Features="Moisture Resistant", Height=0.035inch, Lead Free="Lead Free", Length=3.2mm, Military Standard=Not, Mount="Surface Mount", Number of Pins=2, Number of Terminations=2, Packaging="Tape and Reel", Power Rating=1W, Radiation Hardening=No, RoHS Compliant=Yes, Series=WSLP, Size Code=1206, Termination=SMD/SMT, Tolerance=1%, Weight=0.000571oz, Width=0.063inch
R12 R13: library part CMP-1011-00590-4, "RES Thick Film, 5.1kΩ, 1%, 0.063W, 100ppm/°C, 0402", Case Code (Imperial)=0402, Case Code (Metric)=1005, Max Operating Temperature=155°C, Max Power Dissipation=63mW, Min Operating Temperature=-55°C, Package Quantity=10, Resistance=5.1kR, Temperature Coefficient=100ppm/°C, Tolerance=1%, Voltage Rating=50V, Case/Package=0402, Composition="Thick Film", Contact Plating=Tin, Depth=0.5mm, Features="Automotive AEC-Q200", Height=0.35mm, Lead Free="Lead Free", Length=1mm, Military Standard=Not, Number of Terminations=2, Packaging="Tape and Reel", Power Rating=63mW, Radiation Hardening=No, Termination=SMD/SMT, Voltage Rating (DC)=50V, Weight=2.3E-05oz, Width=0.02inch
R16: library part CMP-2000-03293-2, "RES Thick Film, 3kΩ, 1%, 0.1W, 100ppm/°C, 0603", Case Code (Imperial)=0603, Case Code (Metric)=1608, Max Operating Temperature=155°C, Max Power Dissipation=100mW, Min Operating Temperature=-55°C, Package Quantity=10, Resistance=3kR, Temperature Coefficient=100ppm/°C, Tolerance=1%, Voltage Rating=75V, Case/Package=0603, Composition="Thick Film", Contact Plating=Tin, Depth=0.85mm, Features="Automotive AEC-Q200", Height=0.45mm, Lead Free="Lead Free", Length=1.55mm, Military Standard=Not, Mount="Surface Mount", Number of Terminations=2, Packaging="Tape and Reel", Power Rating=100mW, Radiation Hardening=No, Termination=SMD/SMT, Voltage Rating (DC)=75V, Weight=7.1E-05oz, Width=0.85mm
R17: library part CMP-2002-00976-1, Manufacturer=Panasonic, Part Number=ERJ-2RKF5113X
R18: library part CMP-2002-07040-1, Manufacturer="Yageo / Phycomp", Part Number=RC0402FR-0791KL
U1: library part BQ29701DSER, "Power Supply Support Circuit, Fixed, 1 Channel, PDSO6", Case/Package=VSON, Manufacturer="Texas Instruments", Max Operating Temperature=85°C, Max Supply Voltage=8V, Min Operating Temperature=-40°C, Min Supply Voltage=1.5V, Nominal Supply Voltage=3.6V, Package Body Material=Plastic, Package Shape=Square, Package Style="SMALL OUTLINE, VERY THIN PROFILEMeter", Peak Reflow Temperature (Cel)=260°C, Supplier Part Number=296-39944-1-ND, Temperature Grade=INDUSTRIAL, Adjustable Threshold=No, Category="Battery Management", Channels=1, ComponentLink1Description=https://www.ti.com:443/lit/ds/symlink/bq2970.pdf?src-supplier=IHS+Markit, ComponentLink1URL=https://www.ti.com:443/lit/ds/symlink/bq2970.pdf?src-supplier=IHS+Markit, ComponentLink2Description=http://www.ti.com/lit/gpn/bq2970?src-supplier=Mouser, ComponentLink2URL=http://www.ti.com/lit/gpn/bq2970?src-supplier=Mouser, ComponentLink3Description=http://www.ti.com/lit/ds/symlink/bq2971.pdf?src-supplier=Digikey, ComponentLink3URL=http://www.ti.com/lit/ds/symlink/bq2971.pdf?src-supplier=Digikey, ComponentLink4Description=http://www.ti.com/general/docs/suppproductinfo.tsp?distId=10&amp;gotoUrl=http%3A%2F%2Fwww.ti.com%2Flit%2Fgpn%2Fbq2971&src-supplier=Digikey, ComponentLink4URL=http://www.ti.com/general/docs/suppproductinfo.tsp?distId=10&amp;gotoUrl=http%3A%2F%2Fwww.ti.com%2Flit%2Fgpn%2Fbq2971&src-supplier=Digikey, ComponentLink5Description=http://www.ti.com/general/docs/lit/getliterature.tsp?genericPartNumber=BQ2970&&fileType=pdf&src-supplier=Avnet, ComponentLink5URL=http://www.ti.com/general/docs/lit/getliterature.tsp?genericPartNumber=BQ2970&&fileType=pdf&src-supplier=Avnet, Height - Seated (Max)=0.8mm, JESD-30 Code=S-PDSO-N6, JESD-609 Code=e4, Length=1.5mm, Manufacturer Part Number=BQ29701DSER, Moisture Sensitivity Level=1, Number of Channels=1, Pins=6, Pricing="1=0.45, 10=0.316, 25=0.2824, 100=0.2448, 250=0.22688, 500=0.2161, 1000=0.20722, 3000=0.19625, 6000=0.19088, 9000=0.18819, 15000=0.18521, 21000=0.18347, 30000=0.18179 (USD)", Reach SVHC Compliant=Yes, RoHS=Yes, RoHS Compliant=Yes, Stock=825, Supplier=Digikey, Supplier 1=Digikey, Supplier Part Number 1=296-39944-1-ND, Surface Mount=Yes, Terminal Finish=Nickel, Terminal Form="No Lead", Terminal Pitch=0.5mm, Terminal Position=DUAL, Throw Configuration="POWER SUPPLY SUPPORT CIRCUIT", Width=1.5mm
U2: library part CMP-0321-00226-2, "USB-Friendly Li-Ion Battery Charger and Power-Path Management IC, Vout 200 mV above Vbat, 4.3 V, -40 to 85 degC, 16-pin QFN (RGT), Green (RoHS & no Sb/Br)", Manufacturer="Texas Instruments", Over Voltage Protection=N, PartNumber=BQ24072RGTT, Code_JEDEC=MO-220, ComponentLink1Description=Datasheet, ComponentLink1URL=http://www.ti.com/general/docs/lit/getliterature.tsp?genericPartNumber=BQ24072&fileType=pdf, DatasheetVersion=SLUS810G, Eco-Plan="Green (RoHS & no Sb/Br)", Lead Acid=N, Li-Ion=Y, Li-Polymer=Y, Mounting Technology="Surface Mount", NiCd=N, NiMH=N, PackageDescription="16-Pin Plastic Quad Flat No-Lead, 3 x 3 mm Body, 0.5 mm Pitch, 1.7 x 1.7 mm Exposed Pad", PackageReference=RGT0016C, PackageVersion="revH, Oct-2011", SubFamily="Battery Charge Management", Vin(Min)(V)=4.3
U5: library part TPS631000DRLR, "1.5-A output current, high-power-density buck-boost converter", Package="SOT-583 Texas Instruments", Check_prices=https://www.snapeda.com/parts/TPS631000DRLR/Texas+Instruments/view-part/?ref=eda, MF="Texas Instruments", MP=TPS631000DRLR, SnapEDA_Link=https://www.snapeda.com/parts/TPS631000DRLR/Texas+Instruments/view-part/?ref=snap

## Free pads (board coordinates)
  round 1.152 hole 1.152 unplated mask+0.148: 0(-14.75,-18.5) 0(-14.75,1.25) 0(15.75,-18.5) 0(15.75,1.25)

## Via types
v1: diameter 0.4, hole 0.3, L1 to L2, 102 vias

## Nets (pads, with @x,y where several pads share a name; then routed paths per layer and width w, separated by ;. In a path a pad name is that pad's centre, name@x,y a point inside that pad or via, vN(x,y) a via of type N, cw(c..) or ccw(c..) an arc to the next point about the centre after c; other vN are vias at no path point)
3.3V: C10.1 J2.A01 J2.B01 R12.1 R13.1 R15.2 R17.2 U5.1 | length 33.9
  L1 w0.3: -9,1.75 v1(-8.5,1.75) ; R17.2 v1(-4.75,-0.5) ; R13.1 R13.1 v1@1.001,0.501 ; v1(3.568,-0.318) 3.588,-0.299 4.196,-0.299 R12.1 ; R15.2 v1(5,-1.75) ; v1(1,0.5) v1@1.001,0.501
  L1 w0.5: J2.A01 -9,4.25 ; U5.1@-8.759,-1.396 -8.942,-0.538 C10.1 -9,0.409 -9,1.75 -9,4.25 ; v1(-8.25,4.25) -9,4.25
  L2 w0.3: v1(-8.5,1.75) -5.5,1.75 ; v1(-4.75,-0.5) -4.75,1 -5.5,1.75 ; v1@3.549,-0.272 5,-1.723 v1(5,-1.75) ; v1(3.568,-0.318) 2.748,0.502 1.002,0.502 v1(1,0.5) -0.25,1.75 -5.5,1.75
  L2 w0.5: J2.B01 -8.9,7.15 -8.9,4.9 v1(-8.25,4.25)
CHG: D1.2 U2.9 | length 14.8
  L1 w0.25: v1(-7.66,-7.554) -7.641,-7.573 -7.641,-8.178 U2.9
  L1 w0.3: U2.9@-7.609,-8.177 U2.9 ; D1.2 -0.15,-15.2 0.611,-14.439 0.611,-12.914 0.5,-12.803 v1(0.5,-11.25)
  L2 w0.3: v1(-7.66,-7.554) -4.829,-7.554 -1.133,-11.25 v1(0.5,-11.25)
DN: J1.A7 J1.B7 J2.A14 J2.B14 | length 57.7
  L1 w0.2: J1.B7 -6.425,-14.368 -6.28,-14.223 -6.28,-14.198 -5.661,-13.579 -5.661,-13.226 J1.A7 ; v1(5.75,4.5) 5.75,4.554 5.85,4.654 5.85,7 J2.A14
  L2 w0.2: J1.B7 -6.381,-14.534 -6.352,-14.563 -6.352,-14.602 -6.352,-14.908 -4.991,-16.27 14.73,-16.27 15.012,-16.27 15.852,-15.43 15.852,-15.148 15.852,-1.102 13.148,1.602 10.148,1.602 7.25,4.5 6.7,4.5 6.1,5.1 ; v1(5.75,4.5) 5.779,4.529 5.779,4.779 6.1,5.1 ; J2.B14 6.1,5.1
DP: J1.A6 J1.B6 J2.A12 J2.B12 | length 57.7
  L1 w0.2: v1(4,4.25) 4,4.304 4.1,4.404 J2.A12
  L2 w0.2: J1.A6 -6.339,-13.226 -6.339,-13.52 -5.661,-14.198 -5.661,-14.404 J1.B6 -5.575,-14.612 -5.43,-14.757 -5.43,-14.782 -4.294,-15.918 14.866,-15.918 15.5,-15.284 15.5,-1.25 13,1.25 10.002,1.25 7.502,3.75 5,3.75 4.5,4.25 4.35,4.25 ; v1(4,4.25) 4.35,4.25 ; J2.B12 4.35,7 4.35,4.25
NetC1_1: C1.1 P1.2 Q2.1 Q2.2 Q2.3 R4.2 U1.4 | length 13.3
  L1 w0.2: 9.679,-5.081 9.73,-5.03 9.781,-4.979 R4.2 ; Q2.1@9.939,-5.861 12.23,-5.861 12.25,-5.842 U1.4
  L1 w0.25: Q2.1@9.744,-6.056 Q2.1@9.939,-5.861 ; 9.789,-6.879 9.872,-6.962
  L1 w0.4: 9.872,-6.962 C1.1
  L1 w0.5: P1.2 8.1,-8.568 9.789,-6.879 Q2.1@9.789,-6.056 ; Q2.3 9.679,-5.081 Q2.2 Q2.1 Q2.1@9.744,-6.056
NetC1_2: C1.2 R1.2 U1.5 | length 3.2
  L1 w0.25: C1.2@12.337,-6.951 12.337,-6.923 12.746,-6.514 12.746,-5.754 U1.5
  L1 w0.4: R1.2 C1.2
NetC4_1: 2.5 C4.1 | length 1.4
  L1 w0.2: C4.1@-2.083,-4.25 -1.933,-4.1 2.5
NetD1_1: D1.1 R5.1 | length 2.4
  L1 w0.3: R5.1 -0.25,-11.389 D1.1
NetD2_2: D2.2 R7.1 | length 3.1
  L1 w0.3: D2.2 R7.1
NetJ1_A5: J1.A5
NetJ1_A8: J1.A8
NetJ1_B5: J1.B5
NetJ1_B8: J1.B8
NetJ2_A02: J2.A02
NetJ2_A03: J2.A03
NetJ2_A04: J2.A04
NetJ2_A05: J2.A05
NetJ2_A07: J2.A07
NetJ2_A08: J2.A08
NetJ2_A09: J2.A09
NetJ2_A10: J2.A10
NetJ2_A11: J2.A11
NetJ2_A13: J2.A13
NetJ2_A15: J2.A15
NetJ2_A17: J2.A17
NetJ2_B02: J2.B02
NetJ2_B03: J2.B03
NetJ2_B04: J2.B04
NetJ2_B05: J2.B05
NetJ2_B07: J2.B07
NetJ2_B08: J2.B08
NetJ2_B09: J2.B09
NetJ2_B10: J2.B10
NetJ2_B11: J2.B11
NetJ2_B13: J2.B13
NetJ2_B15: J2.B15
NetJ2_B17: J2.B17
NetL2_1: L2.1 U5.3 | length 3.4
  L1 w0.3: L2.1 -11.444,-2.873 -10.373,-2.873 -10,-2.5 U5.3
NetL2_2: L2.2 U5.2 | length 3.4
  L1 w0.3: L2.2 -11.434,-1.566 -10.434,-1.566 -10,-2 U5.2
NetP1_MP1: P1.MP1
NetP1_MP2: P1.MP2
NetQ1_4: Q1.4 R2.2 U1.2 | length 6.6
  L1 w0.2: Q1.4 11.487,-0.15 12.75,-1.413 12.75,-3.342 R2.2 12.75,-3.37 U1.2
NetQ1_5-6-7-8: Q1.5-6-7-8 Q2.5-6-7-8 | length 4
  L1 w1: Q2.5-6-7-8 7.852,-5.308 7.852,-1.398 Q1.5-6-7-8
NetQ2_4: Q2.4 R4.1 U1.3 | length 2.9
  L1 w0.2: Q2.4 10.926,-4.106 R4.1 12.23,-4.129 12.25,-4.149 U1.3
NetR3_2: R3.2 U1.6 | length 1.3
  L1 w0.2: U1.6 13.25,-5.35 13.27,-5.33 13.451,-5.33 13.51,-5.272 R3.2
NetR6_2: R6.2 U2.1 | length 1.2
  L1 w0.25: U2.1 -4.572,-9.678 -4.398,-9.852 R6.2
NetR8_2: R8.2 U2.16 | length 2
  L1 w0.25: U2.16 -5.458,-10.414 -5.118,-10.414 -4.849,-10.684 -3.981,-10.684 R8.2
NetR14_1: 2.10 R14.1 | length 1.1
  L1 w0.2: 2.10 3.358,-3.3 3.365,-3.294 R14.1
NetR15_1: 2.12 R15.1 | length 0.6
  L1 w0.2: 3.625,-2.5 R15.1
NetR16_2: R16.2 U2.12 | length 1.2
  L1 w0.3: R16.2 -8.526,-10.084 -8.301,-9.859 -8.139,-9.859 -7.958,-9.678 U2.12
NetR17_1: R17.1 R18.2 U5.8 | length 2.6
  L1 w0.2: U5.8 R17.1 R18.2
NetU1_1: U1.1
NetU2_14: U2.14
NetU4_4: 2.4
NetU4_9: 2.9
NetU4_11: 2.11
PACKP: 2.6 2.7 C5.1 P1.1 R1.1 R11.1 | length 28.4
  L1 w0.2: C5.1 -0.75,-5.6 -0.356,-5.6 0.044,-6 2.25,-6 2.5,-6.25 2.5,-7.75 R11.1 3.305,-7.945 3.305,-4.57 2.7 ; C5.1@-0.824,-5.527 -0.75,-5.453 -0.75,-4.525 2.6
  L1 w0.5: R11.1 3,-8.39 4.61,-10 5.85,-10 6.1,-10.25 6.1,-13.85 6.5,-14.25 10.25,-14.25 12.348,-12.152 R1.1
PGND: 2.3 2.13 C4.2 C5.2 C6.1 C7.2 C8.2 C9.2 C10.2 J1.A1 J1.A12 J1.B1 J1.B12 J1.S1 J1.S2 J1.S3 J1.S4 J2.A06 J2.B06 Q1.1 Q1.2 Q1.3 R2.1 R3.1 R6.1 R8.1 R14.2 R16.1 R18.1 U2.4 U2.5 U2.8 U2.15 U2.17@-6.208,-8.928 U5.7 | length 29.5
  L1 w0.15: U2.5 U2.17@-5.458,-8.178 ; U2.4 U2.17@-5.458,-8.178 ; U2.17@-5.458,-8.178 cw(c-6.208,-8.178) v1(-6.208,-8.928) U2.17@-5.458,-8.178
  L1 w0.2: -7.985,-2.164 -7.821,-2 ; U2.8 U2.17@-6.958,-8.178 ; U2.15 -5.958,-9.178 ccw(c-6.208,-9.178) v1(-6.208,-8.928) ; v1(-2.275,-3.054) -2.256,-3.073 -1.775,-3.073 -1.548,-3.3 2.3 1.05,-3.3 2.13 ; U2.17@-6.958,-8.178 ccw(c-6.208,-8.178) v1(-6.208,-8.928) ; U2.17@-6.958,-8.178 v1(-6.708,-8.428) v1(-6.208,-8.928)
  L1 w0.3: -7.821,-2 U5.7
  L1 w0.4: C9.2 -7.478,-4.522 -7.478,-4.022 -7.985,-3.515 -7.985,-2.164 -7.985,-0.812 -7.926,-0.753 -7.926,-0.369 -7.356,0.201 -7.356,1.144 -4,4.5
  L1 w0.7: -4,4.5 J2.A06
  L2 w0.3: J2.B06 J2.B06@-3.8,7.05
  L2 w0.7: -4,4.5 J2.B06
  other v1: -8,-18.5 12,-18.5 14,-18.5 -12.25,-18.25 -3.942,-18.25 0.478,-18.25 -8,-17.227 -6,-17.227 2,-17.038 6,-17.038 8.25,-17.038 16,-17 -14.75,-16.25 -8.051,-15.74 6,-15.398 8.25,-15.398 12,-15.25 14,-15.25 2,-14.439 -14.75,-13.75 12,-13.75 14,-13.25 2,-12 4.5,-11.75 -14.75,-11.25 14,-11 10.25,-10.75 2,-10 -6.708,-9.428 -5.708,-9.428 14,-9 -14.75,-8.75 5.25,-8.75 7,-8.75 -2.026,-8.571 9.959,-8.459 -5.708,-8.428 6.25,-7.5 7.75,-7.5 -13,-7.25 14,-7 -1.25,-6.5 -14.75,-6.25 -3.25,-6.25 4,-6.25 5,-6 -5.458,-5.6 -11.434,-5.5 4.5,-5.25 -4.626,-4.157 0.35,-4 1.25,-4 2.15,-4 -14.73,-3.67 0.35,-3 1.25,-3 2.15,-3 13.84,-2.828 -3.75,-2.25 10.75,-2.25 13.84,-1.578 10.75,-1.5 -14.73,-1.17 5.75,-1 10.75,-0.75 12.75,0 16,0 -2.5,0.502 -13,1.25 -11.434,1.25 9.25,1.25 7.785,1.285 14.25,1.5 -7.5,3.25 -5.5,3.25 -3.5,3.25 -1.5,3.25 0,3.25
PGOOD: D2.1 U2.7 | length 15.2
  L1 w0.2: v1(-6.9,-6.185) -6.9,-6.191 -6.479,-6.612 -6.479,-7.511 U2.7@-6.462,-7.528
  L1 w0.3: D2.1 -12.75,-14.463 -12.75,-9 -10.014,-6.264 -9.722,-6.264 v1(-9.708,-6.25)
  L2 w0.3: v1(-9.708,-6.25) -6.992,-6.25 -6.927,-6.185 v1(-6.9,-6.185)
SCL: 2.2 J2.A16 J2.B16 R13.2 | length 20.6
  L1 w0.2: 2.2 -0.751,-2.885 -1.465,-2.885 -2,-2.35 -2,-1.25 -1.252,-0.502 R13.2 1.771,-0.481 2.699,-0.481 8.073,4.893 ; J2.A16@8.098,7.248 8.073,7.223 8.073,4.893 ; v1(8.3,4.667) 8.073,4.893
  L2 w0.2: J2.B16 8,5.25 8.073,5.25 8.073,4.893 v1(8.3,4.667)
SDA: 2.1 J2.A18 J2.B18 R12.2 | length 22.1
  L1 w0.2: 2.1 -1.25,-2.5 -1.5,-2.25 -1.5,-1.612 -1.138,-1.25 4.252,-1.25 4.474,-1.028 4.722,-1.028 10.1,4.35 10.1,4.65 ; v1(9.5,4.5) 9.554,4.5 9.704,4.65 10.1,4.65 ; J2.A18 10.1,4.75 10.1,4.65
  L2 w0.2: v1(9.5,4.5) 9.5,4.554 9.913,4.967 9.913,7.063 J2.B18
VBAT: 2.8 C8.1 R11.2 U2.2 U2.3 | length 13.2
  L1 w0.2: R11.2@0.125,-7.675 0.125,-6.875 v1(0.5,-6.5) ; 2.8 v1(4.544,-4.1)
  L1 w0.5: C8.1 -4.016,-8.266 -3.5,-7.75 -0.95,-7.75 R11.2 R11.2@0.125,-7.675
  L2 w0.2: v1(0.5,-6.5) 2.9,-4.1 v1(4.544,-4.1)
VPRE: C6.2 C9.1 R5.2 R7.2 U2.6 U2.10 U2.11 U5.4 U5.5 U5.6 | length 30
  L1 w0.2: v1(-9.25,-3.75) -8.673,-3.75 ; U5.5 U5.6 v1(-6.5,-2.5) ; v1(-5.968,-6.676) -5.963,-6.681 -5.963,-7.523 U2.6
  L1 w0.3: R7.2 -11.923,-8.985 -9.919,-6.981 v1(-9.481,-6.981) -8.541,-6.981 -8.433,-6.873 ; R5.2 -0.13,-10.269 0.481,-10.269 v1(0.5,-10.25)
  L1 w0.5: U5.4@-8.673,-3.09 -8.673,-3.75 -8.673,-4.578 C9.1 -8.563,-4.812 -8.448,-4.928 -8.448,-5.231 -8.433,-5.246 -8.433,-6.873 C6.2
  L2 w0.2: v1(-9.25,-3.75) -6.87,-3.75 -6.5,-3.38 v1(-6.5,-2.5)
  L2 w0.3: v1(-9.481,-6.981) -6.301,-6.981 -5.995,-6.676 -4.961,-6.676 -1.387,-10.25 v1(0.5,-10.25)
VUSB: C7.1 J1.A4 J1.A9 J1.B4 J1.B9 U2.13 | length 10.3
  L1 w0.4: J1.B9 J1.A4 -8.091,-13.106 -8.091,-12.761 -7.212,-11.882 -7.212,-11.31 -7.2,-11.298 C7.1 -7.14,-11.31 -7.14,-11.416 -6.906,-11.65 -5.025,-11.65 -3.923,-12.752 -3.923,-13.025 -3.875,-13.072 J1.B4 ; C7.1@-7.167,-11.217 -6.958,-11.008 U2.13
pads on no net: U2.17@-6.208,-8.928

## Polygon pours and split planes (outlines as drawn)
PGND on L1 "PGND_L01_P040" (solid, remove dead copper, pour order 40): -19.842,-20.039 20.798,-20.039 20.798,5.25 -19.842,5.25
PGND on L1 "PGND_L01_P049" (solid, pour order 49): -8.287,-0.765 -8.263,-0.789 -8.263,-1.213 -7.634,-1.213 -6.713,-1.091 -6.713,-0.765
PGND on L1 "PGND_L01_P046" (solid, pour order 46): -5.579,-6.92 -5.554,-6.945 -5.579,-7 -5.663,-8.409 -4.462,-8.253 -4.217,-7.913 -3.673,-7.369
VBAT on L1 "VBAT_L01_P039" (solid, pour order 39): -5.192,-8.571 -5.192,-9.333 -3.75,-9.333 -3.75,-8.571
PGND on L1 "PGND_L01_P045" (solid, pour order 45): 11.083,-0.475 9.276,-0.475 9.276,-2.334 11.083,-2.334 11.083,-2.253
VPRE on L1 "VPRE_L01_P041" (solid, pour order 41): -7.355,-8.55 -7.355,-9.312 -8.625,-9.312 -8.625,-8.55
PGND on L2 "PGND_L02_P004" (solid, remove dead copper, pour order 4): -17.372,-20.413 -17.372,5.25 21.364,5.25 21.364,-20.413

## Other copper
L1:
  pour cut-out: -4.37,-12.081 -4.397,-11.58 -4.292,-11.471 -3.643,-11.471 -3.393,-11.471 -3.393,-11.87 -3.393,-12.081 -4.301,-12.11
  pour cut-out: -13.041,-0.384 -10.581,-0.384 -10.581,-4.044 -13.041,-4.044
  pour cut-out: 6.337,0.5 9.386,0.5 9.386,-6.75 6.337,-6.75
  pour cut-out: 2.75,-1.5 4.786,-1.534 4.786,-2.415 2.75,-2.415
  pour cut-out: -1.575,-6.985 4.125,-6.985 4.125,-9.5 -1.636,-9.5 -1.636,-9.426

## Silkscreen, mask and mechanical layers (free items; w line width, h text height)
Top Overlay:
  text "." at 10.139,-3.036 h0.6
  text "." at 13.617,-3.666 h0.6
  text "." at -5,-10.5 h0.6
  text "+" at 0.611,-14.25 h1
  text "+" at -13.5,-14.49 h1
  text "-" at -13.5,-15.75 h1
  text "-" at 0.611,-15.75 h1
Bottom Overlay:
  text "dingboard" at 14.327,-4.486 h1
  text "Power 0.0.2" at 15.692,-6.255 h1
  text "zeuldocs.com" at 11.663,-13.34 h1
Mechanical 1:
  lines w0.1: -13.25,2.35 -14.48,2.35 ccw(c-14.48,1.08) -15.75,1.08 -15.75,-18.23 ccw(c-14.48,-18.23) -14.48,-19.5 ; 14.35,2.35 15.48,2.35 cw(c15.48,1.08) 16.75,1.08 16.75,-18.23 cw(c15.48,-18.23) 15.48,-19.5 -14.48,-19.5 ; -14.48,-19.5 ccw(c-14.48,-19.5) -14.48,-19.5